# Altium PCB Elekid.PcbDoc
Units mil, origin at the board's own origin, x right, y up, seen from the top; angles counter-clockwise.
Board outline 2950 x 2000 mil, 2 copper layers (Top Layer, Bottom Layer); 107 components, 65 nets, 335 pads, 35 vias.
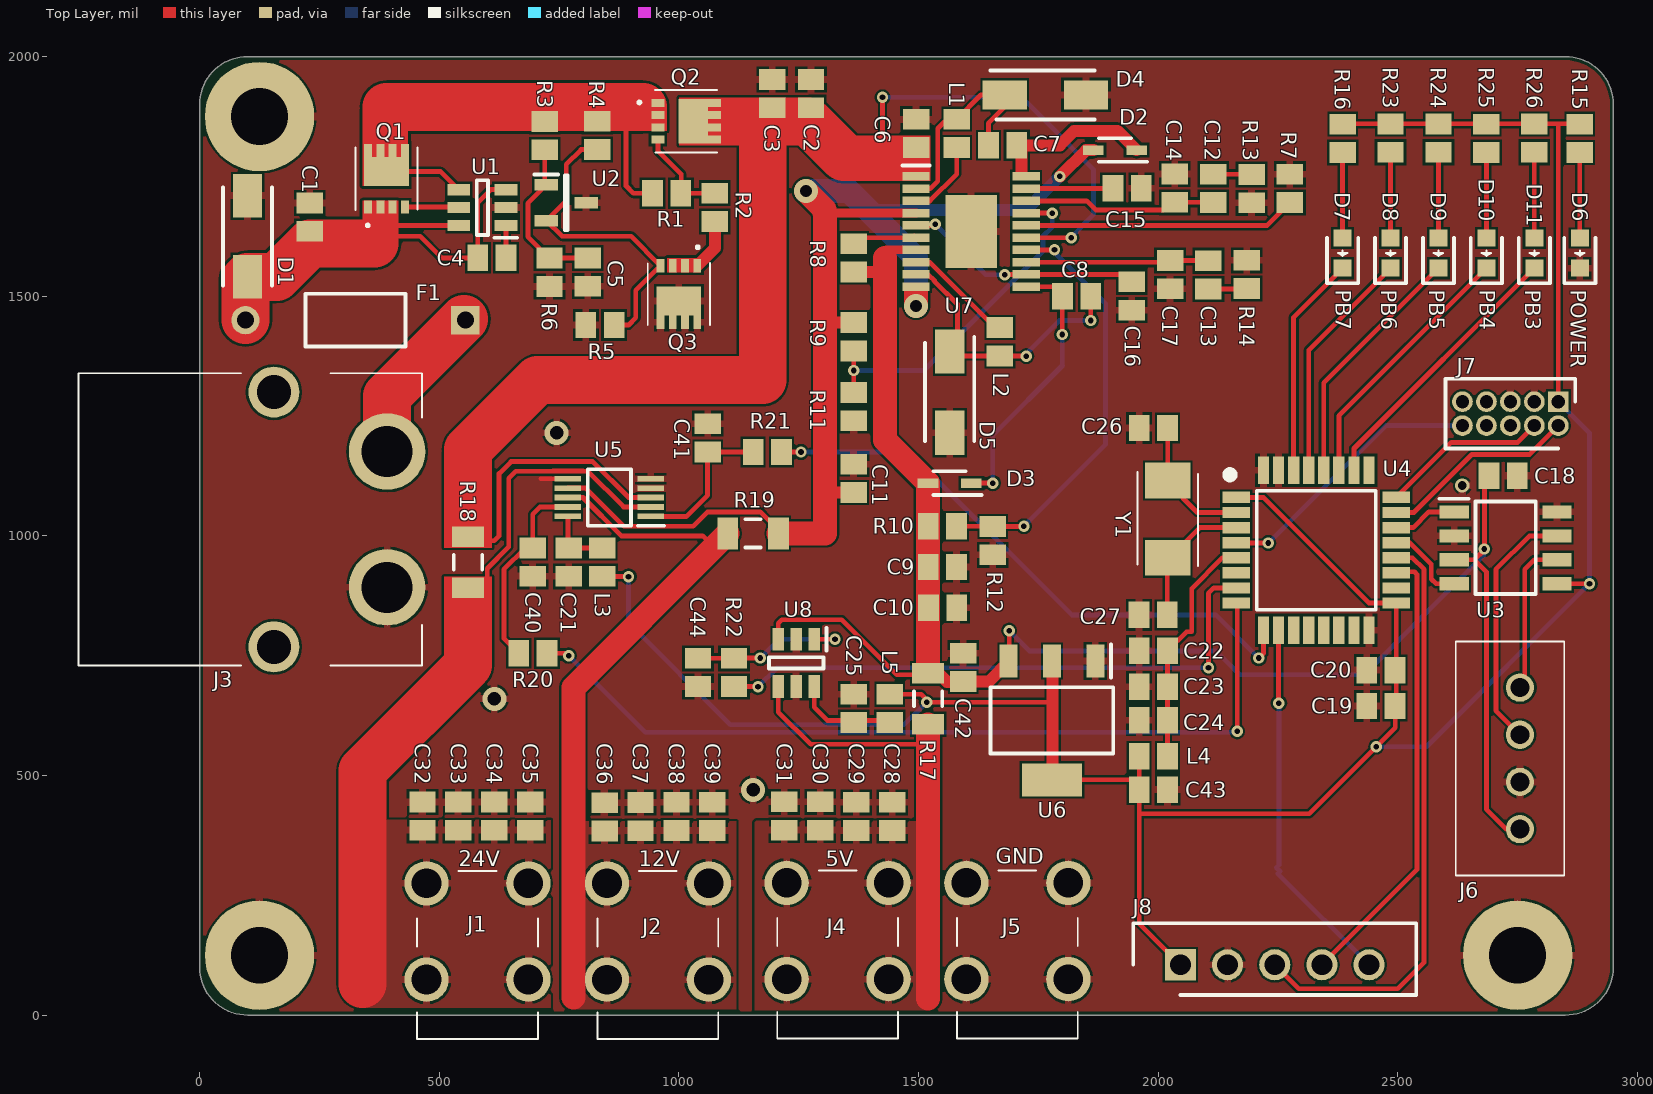
[diagram p0: Top Layer view]
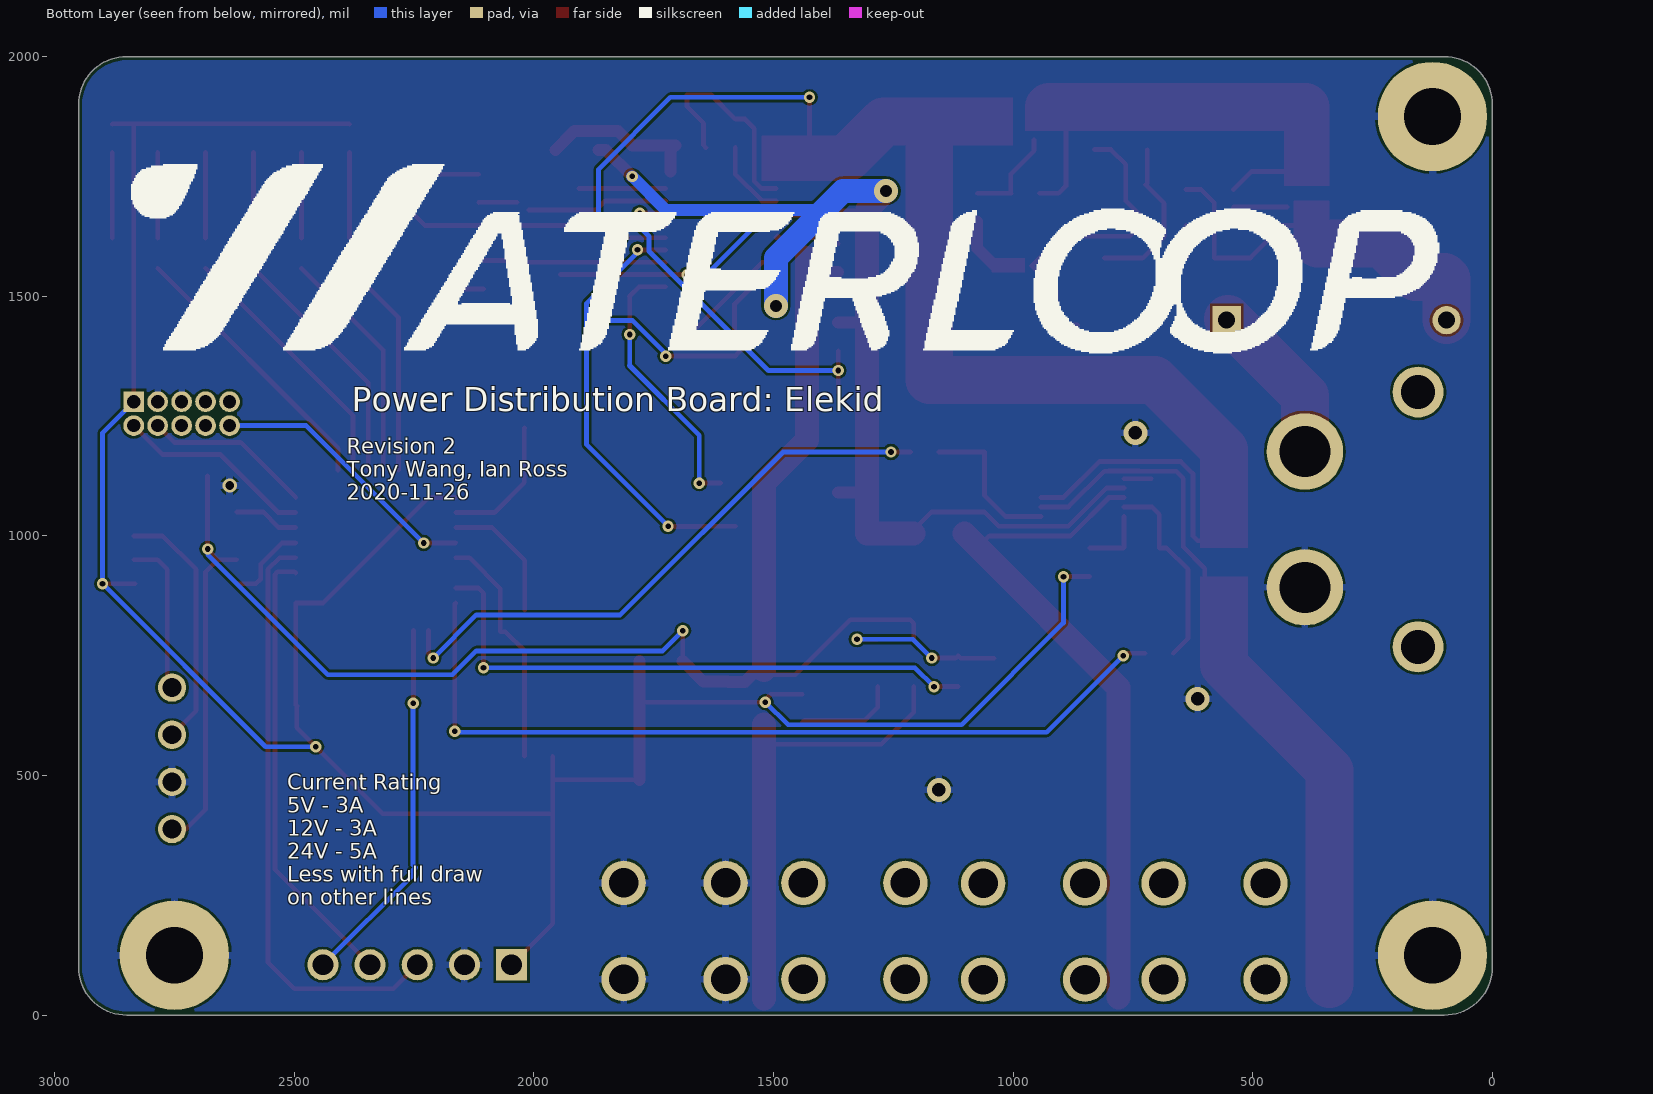
[diagram p1: Bottom Layer view, seen from below]

## Layer stack, top to bottom
Top Solder: solder mask 0.4, Solder Resist, Dk 3.5
Top Layer: signal copper 1.4
Dielectric 1: dielectric 12.6, FR-4, Dk 4.8
Bottom Layer: signal copper 1.4
Bottom Solder: solder mask 0.4, Solder Resist, Dk 3.5

## Board outline
100,0 cw(c100,100) 0,100 0,1900 cw(c100,1900) 100,2000 2850,2000 cw(c2850,1900) 2950,1900 2950,100 cw(c2850,100) 2850,0

## Design rules (kind name [scope] priority, off if disabled: settings)
BoardOutlineClearance [All] p1: gap=7.87 ignorepadtopadclearanceinfootprint=FALSE
Clearance [All] p1: gap=5 ignorepadtopadclearanceinfootprint=FALSE except(9.84: Arc-Hole Track-Hole SMDPad-Hole THPad-Hole Via-Hole Fill-Hole Poly-Hole Region-Hole Text-Hole)
ComponentClearance [All] p1 off: gap=5 collisioncheckmode=3 verticalgap=5 showdistances=TRUE
DiffPairsRouting [All] p1: maxlimit=10 minlimit=5 mostfreqgap=5 toplayer_minwidth=5 toplayer_maxwidth=1000 toplayer_prefwidth=5 bottomlayer_minwidth=5 bottomlayer_maxwidth=1000 bottomlayer_prefwidth=5 maxuncoupledlength=500
Height [All] p1 off: minheight=0 maxheight=71497.94 prefheight=500
HoleSize [All] p1: absolutevalues=TRUE maxlimit=248.03 minlimit=11.81 maxpercent=80.000 minpercent=20.000
HoleToHoleClearance [All] p1: gap=9.84 allowstackedmicrovias=FALSE
MinimumAnnularRing [All] p1: minimumring=3
MinimumSolderMaskSliver [All] p1: minsoldermaskwidth=0
PlaneClearance [All] p1: clearance=5
PlaneConnect PlaneConnectPowerPads [InPadClass('PowerPads')] p1: planeconnectstyle=Relief reliefexpansion=20 reliefentries=4 reliefconductorwidth=15 reliefairgap=10
PlaneConnect [All] p2: pad.planeconnectstyle=Relief pad.reliefexpansion=11.81 pad.reliefentries=4 pad.reliefconductorwidth=5 pad.reliefairgap=5 via.planeconnectstyle=Direct via.reliefexpansion=11.81 via.reliefentries=4 via.reliefconductorwidth=5 via.reliefairgap=5
PolygonConnect PolygonConnectPowerPads [All vs (InPadClass('PowerPads'))] p1: connectstyle=Relief reliefconductorwidth=10 reliefentries=4 polygonreliefangle="90 Angle" airgapwidth=10
PolygonConnect [All] p2: connectstyle=Relief reliefconductorwidth=15 reliefentries=4 polygonreliefangle="90 Angle" airgapwidth=5
RoutingVias [All] p1: holewidth=11.81 width=23.62 viastyle="Through Hole" minholewidth=11.81 minwidth=23.62 maxholewidth=23.62 maxwidth=259.84
SilkToSilkClearance [All] p1: silktosilkclearance=0
SilkToSolderMaskClearance [IsPad] p1: minsilkscreentomaskgap=5 clearancetoexposedcopper=TRUE
SolderMaskExpansion [All] p1: expansion=2.95 istentingtop=FALSE
Width [All] p1: maxlimit=100 minlimit=10 preferedwidth=25
20 further rules are at their usual default settings.

## Classes and differential pairs
component class Monitoring/Control: C18 C19 C20 C21 C23 C24 C25 C26 C27 C28 C29 C30 C31 C32 C33 C34 C35 C36 C37 C38 C39 C40 C41 C44 J6 J7 J8 L3 L4 L5 R17 R18 R19 R20 R21 R22 U3 U4 U5 U8
component class "LED and LDO": C42 C43 D6 D7 D8 D9 D10 D11 R15 R16 R23 R24 R25 R26 U6
component class "Input Protection": C1 C2 C3 C4 C5 D1 F1 Q1 Q2 Q3 R1 R2 R3 R4 R5 R6 U1 U2
component class Elekid: J1 J3 J4 J5
component class "Buck Conversion": C6 C7 C8 C9 C10 C11 C12 C13 C14 C15 C16 C17 D2 D3 D4 D5 L1 L2 R7 R8 R9 R10 R11 R12 R13 R14 U7

## Components (designator, comment, footprint, x,y, rotation, side; value= is the part's Value field where it differs from the comment)
C1 "Cap" C0805 230,1665 r270 top value=100pF
C2 "Cap" C0805 1275.82,1922.84 r270 top value=4.7uF
C3 "Cap" C0805 1195.02,1922.84 r270 top value=4.7uF
C4 "Cap" C0805 610,1580 r180 top value=0.1uF
C5 "Cap" C0805 810,1550.47 r90 top value=1nF
C6 "Cap" C0805 1495,1840 r270 top value=4.7u
C7 "Cap" C0805 1675.47,1815 r0 top value=470n
C8 "Cap" C0805 1830,1500 r180 top value=470n
C9 "Cap" C0805 1550,935 r180 top value=5u
C10 "Cap" C0805 1550.47,850 r180 top value=5u
C11 "Cap" C0805 1365,1120 r270 top value=5u
C12 "Cap" C0805 2115,1725 r270 top value=470p
C13 "Cap" C0805 2105,1544.53 r90 top value=470p
C14 "Cap" C0805 2035,1725.47 r270 top value=22p
C15 "Cap" C0805 1935.47,1725 r180 top value=0.1u
C16 "Cap" C0805 1945,1500.47 r90 top value=0.1u
C17 "Cap" C0805 2025,1545 r90 top value=22p
C18 "Cap" C0805 2720,1125 r180 top value=100pF
C19 "Cap" C0805 2465,645 r180 top value=10nF
C20 "Cap" C0805 2465,720 r180 top value=1uF
C21 "Cap" C0805 770,945 r270 top value=100pF
C22 "Cap" C0805 1990,760 r0 top value=10nF
C23 "Cap" C0805 1990,685 r0 top value=1uF
C24 "Cap" C0805 1990,615 r180 top value=100pF
C25 "Cap" C0805 1365,640 r90 top value=100pF
C26 "Cap" C0805 1990,1225 r0 top value=4pF
C27 "Cap" C0805 1989.53,835 r0 top value=4pF
C28 "Cap Pol2" C0805 1445,414.53 r90 top value=100pF
C29 "Cap Pol2" C0805 1370,414.53 r90 top value=100pF
C30 "Cap" C0805 1295,415.47 r270 top value=100pF
C31 "Cap" C0805 1220,415.47 r270 top value=100pF
C32 "Cap Pol2" C0805 465,415 r90 top value=22p
C33 "Cap Pol2" C0805 540,415 r90 top value=22p
C34 "Cap" C0805 615,415 r270 top value=22p
C35 "Cap" C0805 690,415 r270 top value=22p
C36 "Cap Pol2" C0805 845,413.58 r90 top value=22p
C37 "Cap Pol2" C0805 920,414.06 r90 top value=22p
C38 "Cap" C0805 995,414.53 r270 top value=22p
C39 "Cap" C0805 1070,414.53 r270 top value=22p
C40 "Cap" C0805 695,945 r90 top value=10n
C41 "Cap" C0805 1060,1204.53 r270 top value=10n
C42 "Cap2" C0805 1593.5,725.47 r90 top value=10uF
C43 "Cap2" C0805 1990,470 r0 top value=100uF
C44 "Cap" C0805 1040,715 r90 top value=10n
D1 "SMAJ28CA" DIONM5226X262N 100,1625 r270 top
D2 "PMEG4005EJ" SOD2512X80N 1910,1805 r180 top
D3 "PMEG4005EJ" SOD2512X80N 1565,1110 r180 top
D4 "B360A-13-F" DIOM5226X240N 1765,1920 r0 top
D5 "B360A-13-F" DIOM5226X240N 1565,1300 r270 top
D6 "LTST-C191KRKT" LEDC1608X55N 2880,1590 r90 top
D7 "LTST-C191KRKT" LEDC1608X55N 2385,1590 r90 top
D8 "LTST-C191KRKT" LEDC1608X55N 2485,1590 r90 top
D9 "LTST-C191KRKT" LEDC1608X55N 2585,1590 r90 top
D10 "LTST-C191KRKT" LEDC1608X55N 2685,1590 r90 top
D11 "LTST-C191KRKT" LEDC1608X55N 2785,1590 r90 top
F1 "5A" PIN-W2/E2.8 325,1450 r180 top
J1 "7774" 7774 473.5,275 r0 top
J2 "7774" 7774 850,274.84 r0 top
J3 "XT60PW-M" XT60PWM 391.22,1034.25 r90 top
J4 "7774" 7774 1225,275.79 r0 top
J5 "7774" 7774 1600,275.79 r0 top
J6 "B4B-XH-A_LF__SN_" B4BXHALFSN 2755,388.15 r90 top
J7 "GRPB052VWVN-RC" HDRV10W50P127_2X5_635X340X430P 2835,1280 r180 top
J8 "B5B-EH" SHDR5W64P0X250_1X5_1500X380X600P 2046.57,105 r0 top
L1 "Inductor" c0805 1580,1840 r270 top value=5u
L2 "Inductor" c0805 1670,1405 r270 top value=2.7u
L3 "Inductor" c0805 840,945 r90 top value=10mH
L4 "Inductor" c0805 1990,540 r0 top value=10mH
L5 "Inductor" c0805 1440,640 r270 top value=10mH
Q1 "DMT6007LFG-7" DMT6007LFG7 390,1760 r0 top
Q2 "DMT6007LFG-7" DMT6007LFG7 1030,1865 r270 top
Q3 "DMT6007LFG-7" DMT6007LFG7 1000,1490 r180 top
R1 "Res2" C0805 974.53,1715 r180 top value=100k
R2 "Res2" C0805 1075,1685.47 r90 top value=150k
R3 "Res2" C0805 720,1835 r90 top value=47k
R4 "Res2" C0805 830,1835.47 r90 top value=20k
R5 "Res2" C0805 835.47,1440 r0 top value=100k
R6 "Res2" C0805 730,1550 r90 top value=5.23k
R7 "Res2" C0805 2275,1725 r90 top value=20.5k
R8 "Res2" C0805 1365,1580 r90 top value=100k
R9 "Res2" C0805 1365,1415.47 r90 top value=140k
R10 "Res2" C0805 1550,1020 r180 top value=52.5k
R11 "Res2" C0805 1365,1269.53 r90 top value=10k
R12 "Res2" C0805 1655,990 r90 top value=10k
R13 "Res2" C0805 2195,1724.53 r90 top value=40.2k
R14 "Res2" C0805 2185,1545.47 r270 top value=40.2k
R15 "Res2" C0805 2880,1829.53 r90 top value=68
R16 "Res2" C0805 2385,1829.53 r90 top value=68
R17 "Res2" C1206 1520,660 r270 top value=50m
R18 "Res2" C1206 560,945 r270 top value=50m
R19 "Res2" C1206 1155,1005 r180 top value=50m
R20 "Res2" C0805 695.47,755 r0 top value=5k
R21 "Res2" C0805 1184.53,1175 r180 top value=5k
R22 "Res2" C0805 1115,715 r90 top value=5k
R23 "Res2" C0805 2485,1830 r90 top value=68
R24 "Res2" C0805 2585,1830 r90 top value=68
R25 "Res2" C0805 2685,1829.53 r90 top value=68
R26 "Res2" C0805 2785,1830 r90 top value=68
U1 "LM74700QDBVRQ1" SOT95P280X145-6N 590,1685 r180 top
U2 "TL432AIDBZR" SOT95P237X112-3N 765,1695 r0 top
U3 "TJA1051T_3,118" SOIC127P600X175-8N 2725,975 r0 top
U4 "STM32F042K4T6" QFP80P900X900X160-32N 2330,970 r0 top
U5 "INA2181A1IDGST" SOP50P490X110-10N 855,1080 r180 top
U6 "TLV1117-33IDCYR" SOT230P700X180-4N 1778.5,615 r270 top
U7 "LT3501EFE" SOP65P640X120-21N 1610,1635 r0 top
U8 "INA181A1QDBVRQ1" SOT95P280X145-6N 1245,735 r270 top
Y1 "CX5032GB08000H0HPQZ1" CX5032GB08000H0HPQZ1 2020,1035 r90 top

## Footprints (in the part's own frame and the unit in brackets; to place one, negate y for a bottom-side part, rotate by r counter-clockwise, add the part's x,y. Pads: shape width x height; smd on the part's side, far side on the other; paste and mask are expansions set on the pad)
7774 [mm]
  round 2.355 hole 1.57: 1(0,0) 2(5.4,0) 3(0,-5.1) 4(5.4,-5.1)
  silkscreen extent -0.5,-8.25 5.9,0.65, body extent -0.68,-8.25 6.08,0.68, height 4.7
B4BXHALFSN [mm]
  round 1.5 hole 1: 1(0,0) 2(2.5,0) 3(5,0) 4(7.5,0)
  silkscreen extent -2.45,-2.35 9.95,3.4, body extent -2.45,-2.35 9.95,3.4, height 7.1
C0805 [mm] "Chip Capacitor, Body 2.0x1.3mm, IPC High Density"
  rect 1.1x1.4 smd: 1(-0.75,0) 2(0.75,0)
  body extent -1.1,-0.72 1.1,0.72, height 1.4
c0805 [mm] "Chip Capacitor, Body 2.0x1.3mm, IPC High Density"
  rect 1.1x1.4 smd: 1(-0.75,0) 2(0.75,0)
  body extent -1.1,-0.72 1.1,0.72, height 1.4
C1206 [mm] "Chip Capacitor, Body 3.2x1.6mm, IPC High Density"
  rect 1.1x1.7 smd: 1(-1.35,0) 2(1.35,0)
  silkscreen extent -0.4,-0.75 0.4,0.75, body extent -1.7,-0.9 1.7,0.9, height 1.3
CX5032GB08000H0HPQZ1 [mm]
  rect 1.9x2.4 smd: 1(-2.05,0) 2(2.05,0)
  silkscreen extent -2.5,-1.6 2.5,1.6, body extent -2.81,-1.6 2.81,1.6, height 1.2
DIOM5226X240N [mm]
  rect 2.35x1.55 smd: 1(-2.15,0) 2(2.15,0)
  silkscreen extent -2.93,-1.3 2.6,1.3, body extent -2.6,-1.3 2.6,1.3, height 2.4
DIONM5226X262N [mm]
  rect 2.3x1.55 smd: 1(-2.15,0) 2(2.15,0)
  silkscreen extent -2.61,-1.3 2.61,1.3, body extent -2.61,-1.3 2.61,1.3, height 2.62
DMT6007LFG7 [mm]
  rect 0.42x0.7 smd: 1(-0.975,-1.875) 2(-0.325,-1.875) 3(0.325,-1.875) 4(0.975,-1.875) 5(0.975,1.125) 6(0.325,1.125) 7(-0.325,1.125) 8(-0.975,1.125)
  rect 2.37x1.55 smd: 9(0,0)
  silkscreen extent -1.65,-2.9 1.65,1.28, body extent -1.65,-2.18 1.65,1.43, height 0.95
HDRV10W50P127_2X5_635X340X430P [mm]
  rect 1.1x1.1 hole 0.7: 1(0,0)
  round 1.1 hole 0.7: 2(0,1.27) 3(1.27,0) 4(1.27,1.27) 5(2.54,0) 6(2.54,1.27) 7(3.81,0) 8(3.81,1.27) 9(5.08,0) 10(5.08,1.27)
  silkscreen extent -0.9,-1.21 5.98,2.48, body extent -0.64,-1.06 5.71,2.33, height 4.3
LEDC1608X55N [mm]
  rect 0.9x0.95 smd: 1(-0.8,0) 2(0.8,0)
  silkscreen extent -1.6,-0.82 0.8,0.82
PIN-W2/E2.8 [mm] "Thru-Hole; 2 Leads"
  rect 1.5x1.5 hole 0.9: 1(-5.825,0)
  round 1.5 hole 0.9: 2(5.825,0)
  silkscreen extent -2.65,-1.4 2.65,1.4
QFP80P900X900X160-32N [mm]
  rect 1.475x0.6 smd: 1(-4.238,2.8) 2(-4.238,2) 3(-4.238,1.2) 4(-4.238,0.4) 5(-4.238,-0.4) 6(-4.238,-1.2) 7(-4.238,-2) 8(-4.238,-2.8) 17(4.238,-2.8) 18(4.238,-2) 19(4.238,-1.2) 20(4.238,-0.4) 21(4.238,0.4) 22(4.238,1.2) 23(4.238,2) 24(4.238,2.8)
  rect 0.6x1.475 smd: 9(-2.8,-4.238) 10(-2,-4.238) 11(-1.2,-4.238) 12(-0.4,-4.238) 13(0.4,-4.238) 14(1.2,-4.238) 15(2,-4.238) 16(2.8,-4.238) 25(2.8,4.238) 26(2,4.238) 27(1.2,4.238) 28(0.4,4.238) 29(-0.4,4.238) 30(-1.2,4.238) 31(-2,4.238) 32(-2.8,4.238)
  silkscreen extent -4.77,-3.15 3.15,4.2, body extent -4.5,-4.5 4.5,4.5, height 1.6
SHDR5W64P0X250_1X5_1500X380X600P [mm]
  rect 1.65x1.65 hole 1.1: 1(0,0)
  round 1.65 hole 1.1: 2(2.5,0) 3(5,0) 4(7.5,0) 5(10,0)
  silkscreen extent -2.5,-1.6 12.5,2.2, body extent -2.5,-1.9 12.5,1.9, height 6
SOD2512X80N [mm]
  rect 1.1x0.5 smd: 1(-1.15,0) 2(1.15,0)
  silkscreen extent -1.7,-0.63 0.85,0.63, body extent -1.25,-0.63 1.25,0.63, height 0.8
SOIC127P600X175-8N [mm]
  rect 1.55x0.7 smd: 1(-2.725,1.905) 2(-2.725,0.635) 3(-2.725,-0.635) 4(-2.725,-1.905) 5(2.725,-1.905) 6(2.725,-0.635) 7(2.725,0.635) 8(2.725,1.905)
  silkscreen extent -3.5,-2.45 1.6,2.61, body extent -3,-2.45 3,2.45, height 1.75
SOP50P490X110-10N [mm]
  rect 1.4x0.3 smd: 1(-2.2,1) 2(-2.2,0.5) 3(-2.2,0) 4(-2.2,-0.5) 5(-2.2,-1) 6(2.2,-1) 7(2.2,-0.5) 8(2.2,0) 9(2.2,0.5) 10(2.2,1)
  silkscreen extent -2.9,-1.5 1.15,1.5, body extent -2.45,-1.5 2.45,1.5, height 1.1
SOP65P640X120-21N [mm]
  rect 1.45x0.45 smd: 1(-2.925,2.925) 2(-2.925,2.275) 3(-2.925,1.625) 4(-2.925,0.975) 5(-2.925,0.325) 6(-2.925,-0.325) 7(-2.925,-0.975) 8(-2.925,-1.625) 9(-2.925,-2.275) 10(-2.925,-2.925) 11(2.925,-2.925) 12(2.925,-2.275) 13(2.925,-1.625) 14(2.925,-0.975) 15(2.925,-0.325) 16(2.925,0.325) 17(2.925,0.975) 18(2.925,1.625) 19(2.925,2.275) 20(2.925,2.925)
  rect 2.74x3.86 smd: 21(0,0)
  silkscreen extent -3.65,3.5 -2.2,3.5, body extent -3.2,-3.25 3.2,3.25, height 1.2
SOT95P237X112-3N [mm]
  rect 1.25x0.6 smd: 1(-1.05,0.95) 2(-1.05,-0.95) 3(1.05,0)
  silkscreen extent -1.68,-1.46 0.08,1.5, body extent -1.18,-1.46 1.18,1.46, height 1.12
SOT95P280X145-6N [mm]
  rect 1.2x0.6 smd: 1(-1.25,0.95) 2(-1.25,0) 3(-1.25,-0.95) 4(1.25,-0.95) 5(1.25,0) 6(1.25,0.95)
  silkscreen extent -1.85,-1.45 0.3,1.6, body extent -1.4,-1.45 1.4,1.45, height 1.45
SOT230P700X180-4N [mm]
  rect 1.75x0.95 smd: 1(-3.15,2.3) 2(-3.15,0) 3(-3.15,-2.3)
  rect 1.75x3.2 smd: 4(3.15,0)
  silkscreen extent -4.03,-3.25 1.75,3.25, body extent -3.5,-3.25 3.5,3.25, height 1.8
XT60PWM [mm]
  round 4.05 hole 2.7: 1(-3.6,0) 2(3.6,0)
  round 2.7 hole 1.8: 3(6.75,6) 4(-6.75,6)
  silkscreen extent -7.75,-1.85 7.75,16.35, body extent -7.75,-1.85 7.75,16.35, height 8.5

## Part data
C1 C2 C3 C4 C5 C6 C7 C8 C9 C10 C11 C12 C13 C14 C15 C16 C17 C18 C19 C20 C21 C22 C23 C24 C25 C26 C27 C30 C31 C34 C35 C38 C39 C40 C41 C42 C43 C44: "Capacitor", Publisher="Altium Limited"
  C1 C2 C3 C4 C5 C6 C7 C8 C9 C10 C11 C12 C13 C14 C15 C16 C17 C18 C19 C20 C21 C22 C23 C24 C25 C26 C27 C30 C31 C34 C35 C38 C39 C40 C41 C44: LatestRevisionDate=17-Jul-2002, LatestRevisionNote="Re-released for DXP Platform.", PackageDescription="Radial Cap, Thru-Hole; 2 Leads; 0.3 in Pin Spacing", PackageReference=RAD-0.3, Published=8-Jun-2000
  C42 C43: PackageDescription="Capacitor; 2 Leads", PackageReference=CAPR5-4X5, Published=23-Sep-2002
C28 C29 C32 C33 C36 C37: "Polarized Capacitor (Axial)", LatestRevisionDate=17-Jul-2002, LatestRevisionNote="Re-released for DXP Platform.", PackageDescription="Polarized Capacitor; 2 Leads", PackageReference=POLAR0.8, Published=8-Jun-2000, Publisher="Altium Limited"
D1: "TVS Diode (Bi-directional)", Manufacturer_Name=Bourns, Mouser Part Number=652-SMAJ28CA, Arrow Part Number=SMAJ28CA, Arrow Price/Stock=https://www.arrow.com/en/products/smaj28ca/bourns, Datasheet Link=https://www.bourns.com/data/global/pdfs/SMAJ.pdf, Height=2.62mm, Manufacturer_Part_Number=SMAJ28CA, Mouser Price/Stock=https://www.mouser.co.uk/ProductDetail/Bourns/SMAJ28CA?qs=A3H9pljuJ8Rc2FOBsYvsOw%3D%3D
D2 D3: "Schottky Diode", Manufacturer_Name=Nexperia, Mouser Part Number=N/A, Arrow Part Number=PMEG4005EJ, Datasheet Link=http://www.nxp.com/documents/data_sheet/PMEGXX05EH_EJ_SER.pdf, Height=0.8mm, Manufacturer_Part_Number=PMEG4005EJ, Mouser Price/Stock=https://www.mouser.com/Search/Refine.aspx?Keyword=N%2FA
D4 D5: "Diode", Manufacturer_Name="Diodes Inc.", Mouser Part Number=621-B360A-F, Arrow Part Number=B360A-13-F, Arrow Price/Stock=https://www.arrow.com/en/products/b360a-13-f/diodes-incorporated, Datasheet Link=https://www.diodes.com/assets/Datasheets/ds30891.pdf, Height=2.4mm, Manufacturer_Part_Number=B360A-13-F, Mouser Price/Stock=https://www.mouser.co.uk/ProductDetail/Diodes-Incorporated/B360A-13-F?qs=sVoUGXYOGv3xoCWNHVb4bA%3D%3D
D6 D7 D8 D9 D10 D11: "LED", Manufacturer_Name=Lite-On, Mouser Part Number=859-LTST-C191KRKT, Arrow Part Number=LTST-C191KRKT, Arrow Price/Stock=https://www.arrow.com/en/products/ltst-c191krkt/lite-on-technology, Datasheet Link=http://www.mouser.com/ds/2/239/S_110_LTST-C191KRKT-539838.pdf, Height=0.55mm, Manufacturer_Part_Number=LTST-C191KRKT, Mouser Price/Stock=https://www.mouser.co.uk/ProductDetail/Lite-On/LTST-C191KRKT?qs=BAIUz4Y8PJBLfOhzue0q%252BA%3D%3D
F1: library part "Fuse 1", "Fuse", LatestRevisionDate=17-Jul-2002, LatestRevisionNote="Re-released for DXP Platform.", PackageDescription="Thru-Hole; 2 Leads", PackageReference=PIN-W2/E2.8, Published=8-Jun-2000, Publisher="Altium Limited"
J1 J2 J4 J5: "Connector", Manufacturer_Name="Keystone Electronics", Mouser Part Number=534-7774, Arrow Part Number=7774, Datasheet Link=http://keyelco.com/userAssets/file/M65p66.pdf, Height=4.6mm, Manufacturer_Part_Number=7774, Mouser Price/Stock=https://www.mouser.co.uk/ProductDetail/Keystone-Electronics/7774?qs=%252B%252BPv0l39JAFc7pxogUYqRg%3D%3D
J3: "Connector", Manufacturer_Name="Changzou Amass Elec", Arrow Part Number=XT60PW-M, Datasheet Link=https://www.tme.eu/Document/9b8d0c5eb7094295f3d3112c214d3ade/XT60PW%20SPEC.pdf, Height=8.4mm, Manufacturer_Part_Number=XT60PW-M
J6: "Connector", Arrow Part Number=B4B-XH-A(LF)(SN), Manufacturer_Name="JST Sales America", Datasheet Link=https://datasheet.lcsc.com/szlcsc/JST-Sales-America-B4B-XH-A-LF-SN_C144395.pdf, Height=7mm, Manufacturer_Part_Number=B4B-XH-A(LF)(SN)
J7: "Connector", Manufacturer_Name=Sullins, Arrow Part Number=GRPB052VWVN-RC, Datasheet Link=https://media.digikey.com/pdf/Data%20Sheets/Sullins%20PDFs/GRPB_%20_2VWVN-RC%2010954-C.pdf, Height=4.3mm, Manufacturer_Part_Number=GRPB052VWVN-RC
J8: "Connector", Manufacturer_Name="JST (JAPAN SOLDERLESS TERMINALS)", Datasheet Link=http://www.jst-mfg.com/product/pdf/eng/eEH.pdf, Height=6mm, Manufacturer_Part_Number=B5B-EH
Q1 Q2 Q3: "MOSFET (N-Channel)", Manufacturer_Name="Diodes Inc.", Mouser Part Number=621-DMT6007LFG-7, Arrow Part Number=DMT6007LFG-7, Arrow Price/Stock=https://www.arrow.com/en/products/dmt6007lfg-7/diodes-incorporated, Datasheet Link=https://componentsearchengine.com/Datasheets/1/DMT6007LFG-7.pdf, Height=0.85mm, Manufacturer_Part_Number=DMT6007LFG-7, Mouser Price/Stock=https://www.mouser.com/Search/Refine.aspx?Keyword=621-DMT6007LFG-7
R1 R2 R3 R4 R5 R6 R7 R8 R9 R10 R11 R12 R13 R14 R15 R16 R17 R18 R19 R20 R21 R22 R23 R24 R25 R26: "Resistor", LatestRevisionDate=17-Jul-2002, LatestRevisionNote="Re-released for DXP Platform.", PackageDescription="Axial Device, Thru-Hole; 2 Leads; 0.4 in Pin Spacing", PackageReference=AXIAL-0.4, Published=8-Jun-2000, Publisher="Altium Limited"
U1: "Integrated Circuit", Manufacturer_Name="Texas Instruments", Mouser Part Number=595-LM74700QDBVRQ1, Arrow Part Number=LM74700QDBVRQ1, Arrow Price/Stock=https://www.arrow.com/en/products/lm74700qdbvrq1/texas-instruments, Datasheet Link=http://www.ti.com/lit/gpn/LM74700-Q1, Height=1.45mm, Manufacturer_Part_Number=LM74700QDBVRQ1, Mouser Price/Stock=https://www.mouser.co.uk/ProductDetail/Texas-Instruments/LM74700QDBVRQ1?qs=j%252B1pi9TdxUYjAZhGV8eSkQ%3D%3D
U2: "Integrated Circuit", Manufacturer_Name="Texas Instruments", Mouser Part Number=595-TL432AIDBZR, Arrow Part Number=TL432AIDBZR, Arrow Price/Stock=https://www.arrow.com/en/products/tl432aidbzr/texas-instruments, Datasheet Link=http://www.ti.com/lit/gpn/tl432a, Height=1.12mm, Manufacturer_Part_Number=TL432AIDBZR, Mouser Price/Stock=https://www.mouser.co.uk/ProductDetail/Texas-Instruments/TL432AIDBZR?qs=odmYgEirbwzw%252BopYvrzCyA%3D%3D
U3: "Integrated Circuit", Arrow Part Number=TJA1051T/3,118, Manufacturer_Name=NXP, Mouser Part Number=771-TJA1051T3118, Arrow Price/Stock=https://www.arrow.com/en/products/tja1051t3118/nxp-semiconductors, Datasheet Link=http://www.nxp.com/docs/en/data-sheet/TJA1051.pdf, Height=1.75mm, Manufacturer_Part_Number=TJA1051T/3,118, Mouser Price/Stock=https://www.mouser.co.uk/ProductDetail/NXP-Semiconductors/TJA1051T-3118?qs=O%2F7ihdSJpebv1PFlp05wnQ%3D%3D
U4: "Integrated Circuit", Manufacturer_Name=STMicroelectronics, Mouser Part Number=511-STM32F042K4T6, Arrow Part Number=STM32F042K4T6, Arrow Price/Stock=https://www.arrow.com/en/products/stm32f042k4t6/stmicroelectronics, Datasheet Link=https://www.mouser.com/datasheet/2/389/stm32f042c4-956225.pdf, Height=1.6mm, Manufacturer_Part_Number=STM32F042K4T6, Mouser Price/Stock=https://www.mouser.co.uk/ProductDetail/STMicroelectronics/STM32F042K4T6?qs=ClYTdQWm4hDAfZj5dd9NhA%3D%3D
U5: library part INA2181A4IDGST, "Integrated Circuit", Manufacturer_Name="Texas Instruments", Mouser Part Number=595-INA2181A4IDGST, Arrow Part Number=INA2181A4IDGST, Arrow Price/Stock=https://www.arrow.com/en/products/ina2181a4idgst/texas-instruments, Datasheet Link=http://www.ti.com/lit/ds/symlink/ina2181.pdf, Height=1.1mm, Manufacturer_Part_Number=INA2181A4IDGST, Mouser Price/Stock=https://www.mouser.co.uk/ProductDetail/Texas-Instruments/INA2181A4IDGST?qs=j%252B1pi9TdxUbPFaAVw1%2FxVg%3D%3D
U6: library part TLV1117-33CDCYR, "Integrated Circuit", Manufacturer_Name="Texas Instruments", Mouser Part Number=595-TLV1117-33CDCYR, Arrow Part Number=TLV1117-33CDCYR, Arrow Price/Stock=https://www.arrow.com/en/products/tlv1117-33cdcyr/texas-instruments, Datasheet Link=http://www.ti.com/lit/gpn/tlv1117, Height=1.8mm, Manufacturer_Part_Number=TLV1117-33CDCYR, Mouser Price/Stock=https://www.mouser.co.uk/ProductDetail/Texas-Instruments/TLV1117-33CDCYR?qs=p6lVfQR1GSoiRKz8KGIbKg%3D%3D
U8: "Integrated Circuit", Manufacturer_Name="Texas Instruments", Mouser Part Number=595-INA181A1QDBVRQ1, Arrow Part Number=INA181A1QDBVRQ1, Arrow Price/Stock=https://www.arrow.com/en/products/ina181a1qdbvrq1/texas-instruments, Datasheet Link=http://www.ti.com/lit/gpn/INA181-Q1, Height=1.45mm, Manufacturer_Part_Number=INA181A1QDBVRQ1, Mouser Price/Stock=https://www.mouser.co.uk/ProductDetail/Texas-Instruments/INA181A1QDBVRQ1?qs=EBDBlbfErPx7yYU5sEtaJQ%3D%3D
Y1: "Crystal or Oscillator", Manufacturer_Name="Kyocera Electronic Components", Mouser Part Number=581-CX532GB8HHPQZ1, Arrow Part Number=CX5032GB08000H0HPQZ1, Datasheet Link=https://media.digikey.com/pdf/Data%20Sheets/AVX%20PDFs/CX5032GB0yyyyyH0HPQZ1_Series_Spec.pdf, Height=1.1mm, Manufacturer_Part_Number=CX5032GB08000H0HPQZ1, Mouser Price/Stock=https://www.mouser.co.uk/ProductDetail/Kyocera-Electronic-Components/CX5032GB08000H0HPQZ1?qs=mFMVSnANsC2SO%252B6cjFFj8w%3D%3D
L1 L2 L3 L4 L5: Code_IEC=1005, Code_JEITA=0402, LatestRevisionDate=29-May-2009, LatestRevisionNote="IPC-7351 Footprint Added.", PackageDescription="Chip Inductor", PackageReference=0402-A, Published=8-Jun-2000, Publisher="Altium Limited"

## Free pads (board coordinates)
  round 228.35 hole 118.11: MOUNT1(125,1875) MOUNT2(2750,125) MOUNT3(125,125)

## Via types
v1: diameter 23.62, hole 11.81, Top Layer to Bottom Layer, 29 vias
v2: diameter 50, hole 28, Top Layer to Bottom Layer, 3 vias
v3: diameter 50, hole 25, Top Layer to Bottom Layer, 2 vias
v4: diameter 30, hole 18, Top Layer to Bottom Layer, 1 vias

## Nets (pads, with @x,y where several pads share a name; then routed paths per layer and width w, separated by ;. In a path a pad name is that pad's centre, name@x,y a point inside that pad or via, vN(x,y) a via of type N, cw(c..) or ccw(c..) an arc to the next point about the centre after c; other vN are vias at no path point)
+3.3V: C19.1 C20.1 C43.1 J7.1 J8.1 L3.1 L4.1 L5.1 R15.2 R16.2 R23.2 R24.2 R25.2 R26.2 U3.5 U4.1 U4.17 U6.2 U6.4 | length 5567.1
  Top Layer w10: L3.1 894.53,915.47 v1(895,915) ; L5.1 1505.47,669.53 1520,655 1518,653 v1(1517,653) 1778,653 1780,655 ; U6.4 1780,490.98 C43.1@1960.47,490.98 ; L4.1 C43.1@1960.47,490.98 ; J8.1 1960.47,191.1 1960.47,420 ; U4.1 2219.76,1080.24 2440.24,859.76 U4.17 2496.85,647.32 C19.1 2495,644.53 2495,600 v1(2455,560) 2315,420 1960.47,420 ; R16.2 2385.94,1860 2835,1860 ; U3.5 v1(2900,900) ; J7.1 2835,1860 ; R15.2 2879.06,1860 2835,1860 ; 1960.47,420 C43.1 C43.1@1960.47,490.98
  Top Layer w25: U6.4@1780,490.98 1780,655 U6.2@1780,739.02
  Bottom Layer w10: v1(895,915) 895,818.33 1107.59,605.74 1469.74,605.74 v1(1517,653) ; v1(2455,560) 2560,560 v1(2900,900) 2900,1215 J7.1
+3.3VA-Amp1: C25.1 L5.2 U8.6 | length 214.1
  Top Layer w10: U8.6 1282.4,642.6 1310,615 1435.47,615 L5.2
+3.3VA-Amp2: C21.1 L3.2 U5.10 | length 136.8
  Top Layer w10: U5.10 768.39,976.14 C21.1 L3.2
+3.3VA-MCU: C22.2 C23.2 C24.1 L4.2 U4.5 | length 496.8
  Top Layer w10: L4.2 C23.2 C22.2 2059.53,800 2070,800 2070,890 2134.25,954.25 U4.5
+5V: C9.2 C10.2 C18.2 C42.1 D3.2 J6.1 R8.1 R10.2 R17.1 U3.3 U6.3 U7.7 U8.3 | length 3605.7
  Top Layer w10: U8.3 1207.6,817.6 1215,825 1340,825 1455,710 1516.85,710 R17.1 ; U6.3 1689.27,740.34 v1(1689.27,802.32) ; U3.3@2620,950 2660,950 ; C18.2@2680.94,1125 2680.94,979.06 2680.62,978.74 v1(2680.62,972.65) 2680.62,970.62 2680,970 2660,950 ; J6.1 2726.85,388.15 2685,430 2685,925 2660,950
  Top Layer w25: R8.1 1429.53,1550.47 1430,1550 ; R17.1 1541.85,713.15 1560,695 1594.06,695 1595,695.94 1646.38,695.94 U6.3@1689.45,739.02
  Top Layer w50: 1430,1580 1430,1550 1430,1199.72 D3.2 R17.1@1519.72,720.28
  Bottom Layer w10: v1(1689.27,802.32) 1731.6,760 2120,760 2170,710 2430,710 2680.62,960.62 v1(2680.62,972.65)
+12V: C11.2 D2.2 R9.2 R19.1 U5.7 U7.4 U7.10 | length 2576.9
  Top Layer w10: U5.7 804.68,1099.68 805,1100 885,1020 1030,1020 1060,1050 1170,1050 1208.15,1011.85 R19.1
  Top Layer w18.5: 1305.48,1673.39 U7.4
  Top Layer w20: 1305,1672.91 1305.48,1673.39
  Top Layer w25: 1305,1090 1305.47,1090.47 C11.2 ; 1305,1445 R9.2 ; v1(1795,1750) 1850,1805 D2.2
  Top Layer w50: R19.1 1305,1005 1305,1090 1305,1445 1305,1672.91 1305,1673.86 1303.86,1673.86 1303.86,1681.14 v3(1265,1720) ; v3(1495,1480) v3@1495,1500
  Bottom Layer w25: 1395,1680 1725,1680 v1(1795,1750)
  Bottom Layer w50: v3(1265,1720) 1355,1720 1395,1680 1495,1580 v3(1495,1480)
+24V: C2.2 C3.2 C6.2 Q2.5 Q2.6 Q2.7 Q2.8 Q2.9 R18.1 U5.3 U7.1 U7.15 | length 2720.8
  Top Layer w10: 600,990 615,990 625,1000 625,1130 650,1155 820,1155 895,1080 U5.3 ; 1425,1785 v1(1425,1915) ; U7.15 1802.8,1622.2 v1(1818.45,1622.18)
  Top Layer w100: 560,1180 705,1325 1175,1325 1175,1860 ; 1270,1865 1345,1790
  Bottom Layer w10: v1(1425,1915) 1715,1915 1865,1765 1865,1670 1818.45,1623.45 v1(1818.45,1622.18)
+BATT: F1.1 J3.2 | length 343
  Top Layer w100: J3.2 391.22,1291.89 F1.1@551.83,1452.5
ADC4: R22.1 U4.7 | length 1224.6
  Top Layer w10: R22.1 1164.53,685.47 v1(1165,685) ; v1(2105,725) 2105,880 2116.26,891.26 U4.7
  Bottom Layer w10: v1(1165,685) 1205,725 v1(2105,725)
ADC5: R20.2 U4.8 | length 1778.9
  Top Layer w10: R20.2 765,755 v1(770,750) ; U4.8 2164.97,857.95 v1(2164.97,592.03)
  Bottom Layer w10: v1(770,750) 930,590 v1@2165,590 ; v1@2164.97,590.04 v1(2164.97,592.03)
ADC6: R21.1 U4.9 | length 1236.4
  Top Layer w10: R21.1 v1(1255,1175) ; v1(2210,745) 2220,755 2220,802.91 U4.9
  Bottom Layer w10: v1(1255,1175) 1480,1175 1820,835 2120,835 v1(2210,745)
CANRX: U3.4 U4.21 | length 174.7
  Top Layer w10: U4.21 2497.6,985 2526.21,985 2570,941.21 2570,910 2580,900 U3.4
CANTX: U3.1 U4.22 | length 136.7
  Top Layer w10: U4.22 2532.24,1017.24 2565,1050 U3.1@2620,1050
GND: C1.1 C2.1 C3.1 C5.1 C6.1 C9.1 C10.1 C11.1 C14.1 C15.1 C16.1 C17.1 C18.1 C19.2 C20.2 C21.2 C22.1 C23.1 C24.2 C25.2 C26.1 C27.1 C28.2 C29.2 C30.1 C31.1 C32.2 C33.2 C34.1 C35.1 C36.2 C37.2 C38.1 C39.1 C40.1 C41.1 C42.2 C43.2 C44.1 D1.1 D4.2 D5.2 D6.1 J3.1 J5.1 J5.2 J5.3 J5.4 J6.2 J7.3 J7.5 J8.2 pad.MOUNT1 pad.MOUNT2 pad.MOUNT3 Q3.5 Q3.6 Q3.7 Q3.8 Q3.9 R5.1 R6.1 R7.2 R11.1 R12.1 R13.1 R14.1 U1.2 U2.3 U3.2 U3.8 U4.16 U4.31 U4.32 U5.4 U5.5 U5.6 U6.1 U7.21 U8.2 U8.5 | length 56.4
  Top Layer w10: 712,1119.37 U5.6
  other v2: 1155,470 615,660 745,1215
  other v4: 2635,1105
LED_RST: J8.5 U4.10 | length 784.6
  Top Layer w10: U4.10 2251.26,651.74 v1(2252,651)
  Bottom Layer w10: v1(2252,651) 2252,312.88 2247,307.88 2254.8,300.08 2250,295.28 J8.5
NetC1_2: C1.2 C4.2 D1.2 F1.2 Q1.1 Q1.2 Q1.3 U1.3 U1.6 | length 981.8
  Top Layer w10: 365,1610 380,1625 ; U1.6 402.6,1647.6 380,1625 ; U1.3 607.4,1722.4 580.47,1695.47 C4.2 505,1580 460,1625 380,1625
  Top Layer w100: F1.2 95.67,1536.02 D1.2 160.35,1540.35 230,1610 365,1610
NetC4_1: C4.1 U1.1 | length 67.7
  Top Layer w10: U1.1 639.21,1580.31 C4.1
NetC5_2: C5.2 R3.1 R6.2 U2.1 | length 342.3
  Top Layer w10: R3.1 720,1736.06 U2.1 685,1693.74 685,1624.53 R6.2 730.47,1580 C5.2
NetC7_1: C7.1 D4.1 L1.1 U7.2 | length 457.2
  Top Layer w10: U7.2 1524.57,1724.57 1540,1740 1540,1850 1559.53,1869.53 L1.1 1630.47,1920 D4.1 1680.35,1895.35 1645.94,1860.94 C7.1 C7.1@1640.94,1810
NetC7_2: C7.2 D2.1 U7.20 | length 338.4
  Top Layer w25: 1715,1760 1715,1805 C7.2 1795,1815 1825,1845 1915.28,1845 D2.1
NetC8_1: C8.1 D5.1 L2.2 U7.9 | length 598.1
  Top Layer w10: U7.9 1519.57,1545.43 1526.3,1538.7 1527.53,1538.7 1533.39,1532.84 1533.39,1531.61 1581.22,1483.78 1581.22,1406.22 1565,1390 1579.53,1375.47 L2.2 1670.47,1375 v1(1725,1375) ; v1(1859.53,1449.53) C8.1
  Bottom Layer w10: v1(1725,1375) 1725,1380 1794.53,1449.53 v1(1859.53,1449.53)
NetC8_2: C8.2 D3.1 U7.11 | length 578.9
  Top Layer w10: D3.1 v1(1655,1110) ; U7.11 1780.63,1519.84 C8.2 1800,1499.53 v1(1800,1420)
  Bottom Layer w10: v1(1655,1110) 1655,1210 1800.47,1355.47 1800,1355.94 v1(1800,1420)
NetC12_1: C12.1 R13.2 | length 80.2
  Top Layer w10: C12.1 2194.53,1754.53 R13.2
NetC12_2: C12.2 C14.2 U7.18 | length 372.9
  Top Layer w10: U7.18 1851.02,1698.98 1870,1680 C14.2@2010,1680 ; C14.2 2114.53,1695.94 C12.2
NetC13_1: C13.1 R14.2 | length 80.4
  Top Layer w10: C13.1 2184.06,1515 R14.2
NetC13_2: C13.2 C17.2 U7.13 | length 382.3
  Top Layer w10: U7.13 2021.5,1571.02 ccw(c2021.5,1574.53) C17.2 2105,1574.53 C13.2
NetC15_2: C15.2 U7.19 | length 181
  Top Layer w10: U7.19 1905.51,1724.57 C15.2
NetC16_2: C16.2 U7.5 U7.12 | length 494.4
  Top Layer w10: U7.5 1532.8,1647.8 v1(1535,1650) ; v1(1680,1545) 1680.43,1545.43 U7.12 1944.09,1545.43 C16.2@1944.53,1545
  Bottom Layer w10: v1(1535,1650) 1640,1545 v1(1680,1545)
NetC26_2: C26.2 U4.2 Y1.2 | length 283.3
  Top Layer w10: C26.2 2020,1224.53 2020,1110.71 2081.97,1048.74 U4.2
NetC27_2: C27.2 U4.3 Y1.1 | length 276.5
  Top Layer w10: C27.2@2019.06,845 2019.06,949.29 2087.01,1017.24 U4.3
NetC28_1: C28.1 C29.1 C30.2 C31.2 J4.1 J4.2 J4.3 J4.4 R17.2 U8.4 | length 965.6
  Top Layer w10: U8.4 1207.6,632.4 1275,565 1520,565
  Top Layer w50: 1520,35 1520,565 R17.2
NetC32_1: C32.1 C33.1 C34.2 C35.2 J1.1 J1.2 J1.3 J1.4 R18.2 U5.2 | length 1328.8
  Top Layer w10: 600,900 600,931.85 645,976.85 645,1120 660,1135 736.41,1135 736.68,1135.28 800.09,1135.28 800.36,1135 810,1135 884.68,1060.32 U5.2
  Top Layer w100: 340,65 340,510 560,730
NetC36_1: C36.1 C37.1 C38.2 C39.2 J2.1 J2.2 J2.3 J2.4 R19.2 U5.8 | length 1449.2
  Top Layer w10: U5.8 800,1080 880,1000 1050,1000 1073.43,976.57
  Top Layer w50: 780,37 780,683.15 1073.43,976.57 R19.2
NetC40_2: C40.2 R20.1 U5.9 | length 416.5
  Top Layer w10: R20.1 635,785.94 635,930 679.53,974.53 C40.2 695,1045 710.32,1060.32 U5.9
NetC41_2: C41.2 R21.2 U5.1 | length 322.3
  Top Layer w10: U5.1 1014.37,1040.63 1015,1040 1060,1085 C41.2 R21.2
NetC44_2: C44.2 R22.2 U8.1 | length 349.8
  Top Layer w10: C44.2 1109.53,744.53 1115,750 1120,745 v1(1170,745) ; U8.1 v1(1325.79,784.21)
  Bottom Layer w10: v1(1170,745) 1209.21,784.21 v1(1325.79,784.21)
NetD6_2: D6.2 R15.1 | length 178.5
  Top Layer w10: D6.2 R15.1
NetD7_1: D7.1 U4.30 | length 464
  Top Layer w10: U4.30 2282.76,1456.26 D7.1
NetD7_2: D7.2 R16.1 | length 178.5
  Top Layer w10: D7.2 R16.1
NetD8_1: D8.1 U4.29 | length 493.4
  Top Layer w10: U4.29@2315,1137.6 U4.29 2314.25,1387.76 D8.1
NetD8_2: D8.2 R23.1 | length 179
  Top Layer w10: D8.2 R23.1
NetD9_1: D9.1 U4.28 | length 520.8
  Top Layer w10: U4.28 2345.75,1319.25 D9.1
NetD9_2: D9.2 R24.1 | length 179
  Top Layer w10: D9.2 R24.1
NetD10_1: D10.1 U4.27 | length 553
  Top Layer w10: U4.27@2380,1139.61 U4.27 2377.24,1250.75 D10.1
NetD10_2: D10.2 R25.1 | length 178.5
  Top Layer w10: D10.2 R25.1
NetD11_1: D11.1 U4.26 | length 577.5
  Top Layer w10: U4.26 2408.74,1182.24 D11.1
NetD11_2: D11.2 R26.1 | length 179
  Top Layer w10: D11.2 R26.1
NetJ6_3: J6.3 U3.7 | length 524.3
  Top Layer w10: J6.3 2705,635 2705,930 2775,1000 U3.7@2834.57,1000
NetJ6_4: J6.4 U3.6 | length 328.6
  Top Layer w10: J6.4 2765,693.43 2765,930 2785,950 U3.6@2834.57,950
NetL1_2: L1.2 U7.3 | length 163.8
  Top Layer w10: U7.3 1523.98,1698.98 1580,1755 L1.2
NetL2_1: L2.1 U7.8 | length 231.7
  Top Layer w10: U7.8 1523.98,1571.02 1660.47,1434.53 L2.1
NetQ1_4: Q1.4 U1.5 | length 112.9
  Top Layer w10: Q1.4 539.61,1686.18 U1.5
NetQ1_5: Q1.5 Q1.6 Q1.7 Q1.8 Q1.9 Q2.1 Q2.2 Q2.3 R1.2 R3.2 R4.2 U1.4 | length 942.1
  Top Layer w10: Q1.9 503.19,1760 U1.4 ; 925,1895 890,1860 890,1730 905,1715 R1.2
  Top Layer w100: 390,1895 925,1895
NetQ2_4: Q2.4 R1.1 R2.2 | length 203.2
  Top Layer w10: Q2.4 956.18,1803.82 1005,1755 1005,1715.94 R1.1 R2.2
NetQ3_1: Q3.1 Q3.2 Q3.3 R2.1 | length 107.3
  Top Layer w25: Q3.1 1075,1600.43 R2.1
NetQ3_4: Q3.4 R4.1 R5.2 U2.2 | length 670.6
  Top Layer w10: R4.1 795.94,1805.94 765,1775 765,1698.94 U2.2 756.26,1625 900.43,1625 Q3.4 910,1512.2 910,1455 895,1440 R5.2
NetR7_1: R7.1 U7.16 | length 569.6
  Top Layer w10: U7.16 2227.32,1647.8 R7.1
NetR8_2: R8.2 U7.6 | length 136.7
  Top Layer w10: R8.2 1377.68,1622.2 1464.51,1622.2 U7.6@1490.98,1622.2 ; U7.6@1490.98,1626.06 U7.6
NetR9_1: R9.1 R11.2 U7.17 | length 726.4
  Top Layer w10: R11.2 v1(1365,1345) R9.1 ; U7.17 v1(1779.27,1673.39)
  Bottom Layer w10: v1(1365,1345) 1510.85,1345 1759.79,1593.95 1759.79,1624.79 1779.27,1644.27 v1(1779.27,1673.39)
NetR10_1: R10.1 R12.2 U7.14 | length 894.9
  Top Layer w10: R10.1 1654.53,1020 R12.2 1719.53,1019.53 v1(1720,1020) ; U7.14 1778.39,1596.61 1780,1595 1781.51,1595 1781.56,1594.96 v1(1783.7,1597.1)
  Bottom Layer w10: v1(1720,1020) 1890,1190 1890,1485 1782.92,1592.08 1780.8,1594.2 v1(1783.7,1597.1)
NRESET: J7.10 U4.4 | length 573.6
  Top Layer w10: U4.4 2163.9,985 v1(2230,985)
  Bottom Layer w10: v1(2230,985) 2475,1230 J7.10
SCL: J8.4 U4.19 | length 943.2
  Top Layer w10: J8.4 2540,303.15 2540,920 2535,925 2499.09,925 U4.19
SDA: J8.3 U4.20 | length 1243.3
  Top Layer w10: J8.3 2293.43,55 2500,55 2555,110 2555,930 2530.75,954.25 U4.20
SWCLK: J7.4 U4.24 | length 350.2
  Top Layer w10: U4.24 2611.61,1195 2750,1195 J7.4
SWDIO: J7.2 U4.23 | length 413.2
  Top Layer w10: U4.23 2533.74,1048.74 2655,1170 2775,1170 J7.2
pads on no net: J3.3 J3.4 J7.6 J7.7 J7.8 J7.9 U4.6 U4.11 U4.12 U4.13 U4.14 U4.15 U4.18 U4.25

## Polygon pours and split planes (outlines as drawn)
GND on Bottom Layer "GND_L02_P005" (solid, pour order 5): 100,0 cw(c100,100) 0,100 0,1900 cw(c100,1900) 100,2000 2850,2000 cw(c2850,1900) 2950,1900 2950,100 cw(c2850,100) 2850,0
GND on Top Layer "GND_L01_P010" (solid, pour order 10): 100,0 cw(c100,100) 0,100 0,1900 cw(c100,1900) 100,2000 2850,2000 cw(c2850,1900) 2950,1900 2950,100 cw(c2850,100) 2850,0
NetC32_1 on Top Layer "NETC32_1_L01_P009" (solid, pour order 9): 341,408 341,15 733,15 733,407
NetC36_1 on Top Layer "NETC36_1_L01_P008" (solid, pour order 8): 1114,392
NetC36_1 on Top Layer "NETC36_1_L01_P007" (solid, pour order 7): 781,405 781,12 1120,12 1120,404
NetC28_1 on Top Layer "NETC28_1_L01_P004" (solid, pour order 4): 1158,406 1158,10 1521,10 1521,404.97

## Other copper
Top Layer:
  rectangle net NetC32_1: 510,730 610,915
  rectangle net +24V: 510,975 610,1175
  rectangle net +12V: 1470,1495 1520,1515
  rectangle net +5V: 1430,1587.75 1469.87,1605.48
  rectangle net +24V: 1340,1740 1465,1835
  rectangle net +24V: 1465,1740 1525,1835
  rectangle net +24V: 1000,1815 1275,1915
  rectangle net NetQ3_1: 975,1550 1045,1580
  rectangle net NetQ1_5: 905,1845 975,1895
  rectangle net NetQ1_5: 340,1730 435,1890
  rectangle net NetC1_2: 340,1615 415,1700
  region: 305,1285

## Silkscreen, mask and mechanical layers (free items; w line width, h text height)
Top Overlay:
  text "PB7" at 2371,1514 h32 r270
  text "PB6" at 2466,1514 h32 r270
  text "PB5" at 2566,1514 h32 r270
  text "PB4" at 2671,1514 h32 r270
  text "PB3" at 2766,1514 h32 r270
  text "POWER" at 2861,1514 h32 r270
  text "GND" at 1661,316 h32
  text "24V" at 541,311 h32
  text "12V" at 916,311 h32
  text "5V" at 1306,311 h32
Bottom Overlay:
  drawing of 10 lines, arcs and shapes, not listed
  text "Power Distribution Board: Elekid" at 2380,1260 h50
  text "Revision 2 / Tony Wang, Ian Ross / 2020-11-26" at 2390,1075 h32
  text "Current Rating / 5V - 3A / 12V - 3A / 24V - 5A / Less with full draw / on other lines" at 2515,230 h32